# Altium PCB PCB.pcbdoc
Units mil, origin at the board's own origin, x right, y up, seen from the top; angles counter-clockwise.
Board outline 12348.58 x 5931.26 mil, 2 copper layers (Top Layer, Bottom Layer); 75 components, 20 nets, 410 pads, 5 vias.
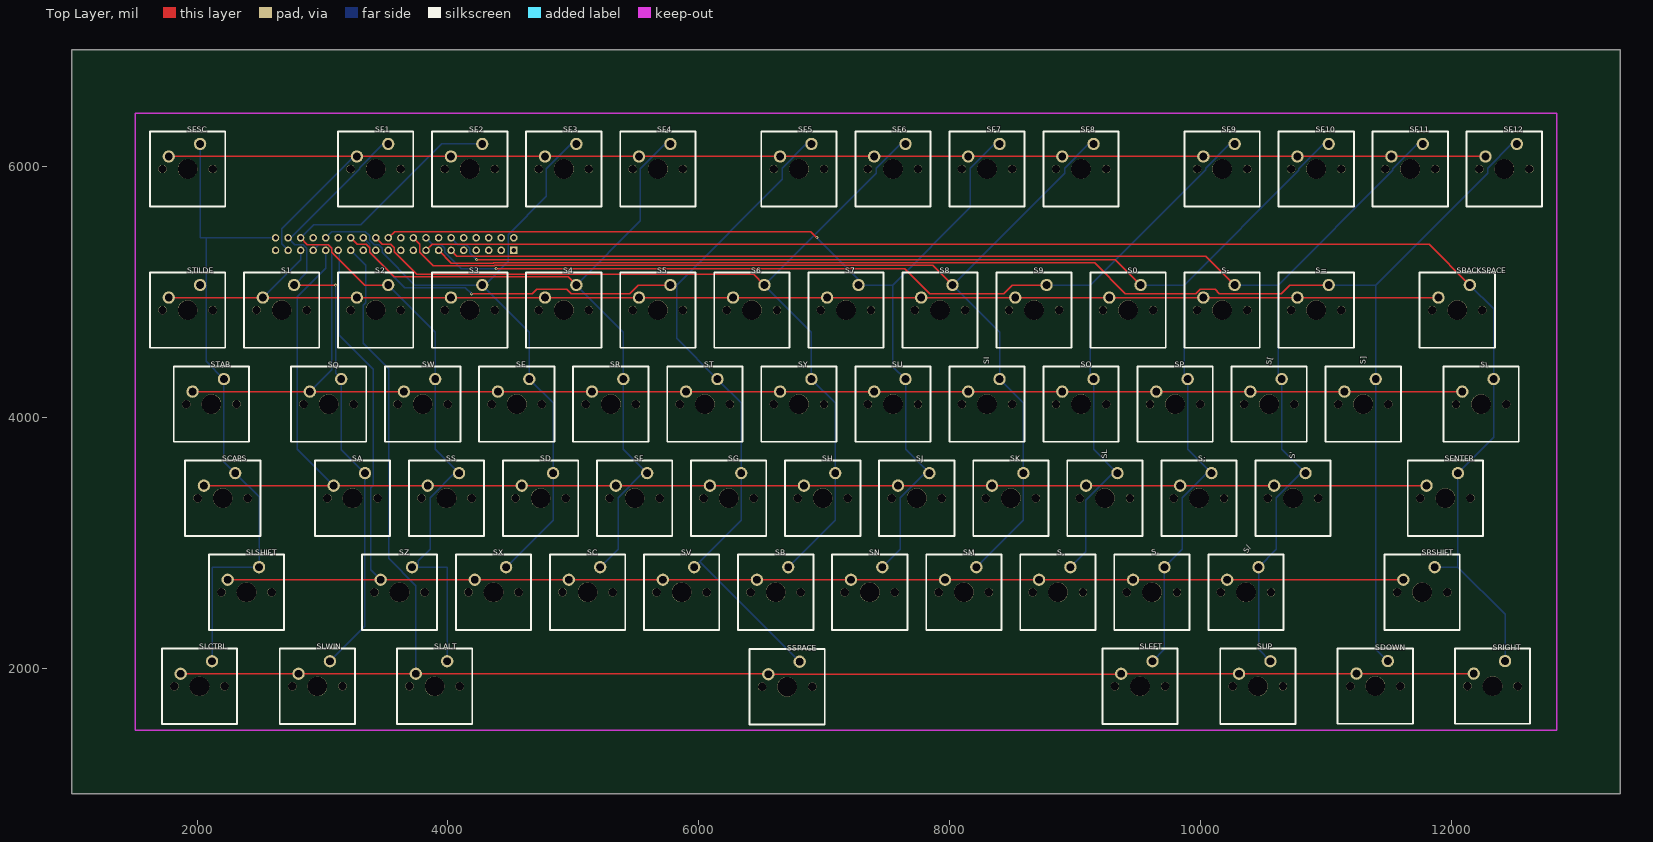
[diagram p0: Top Layer view]
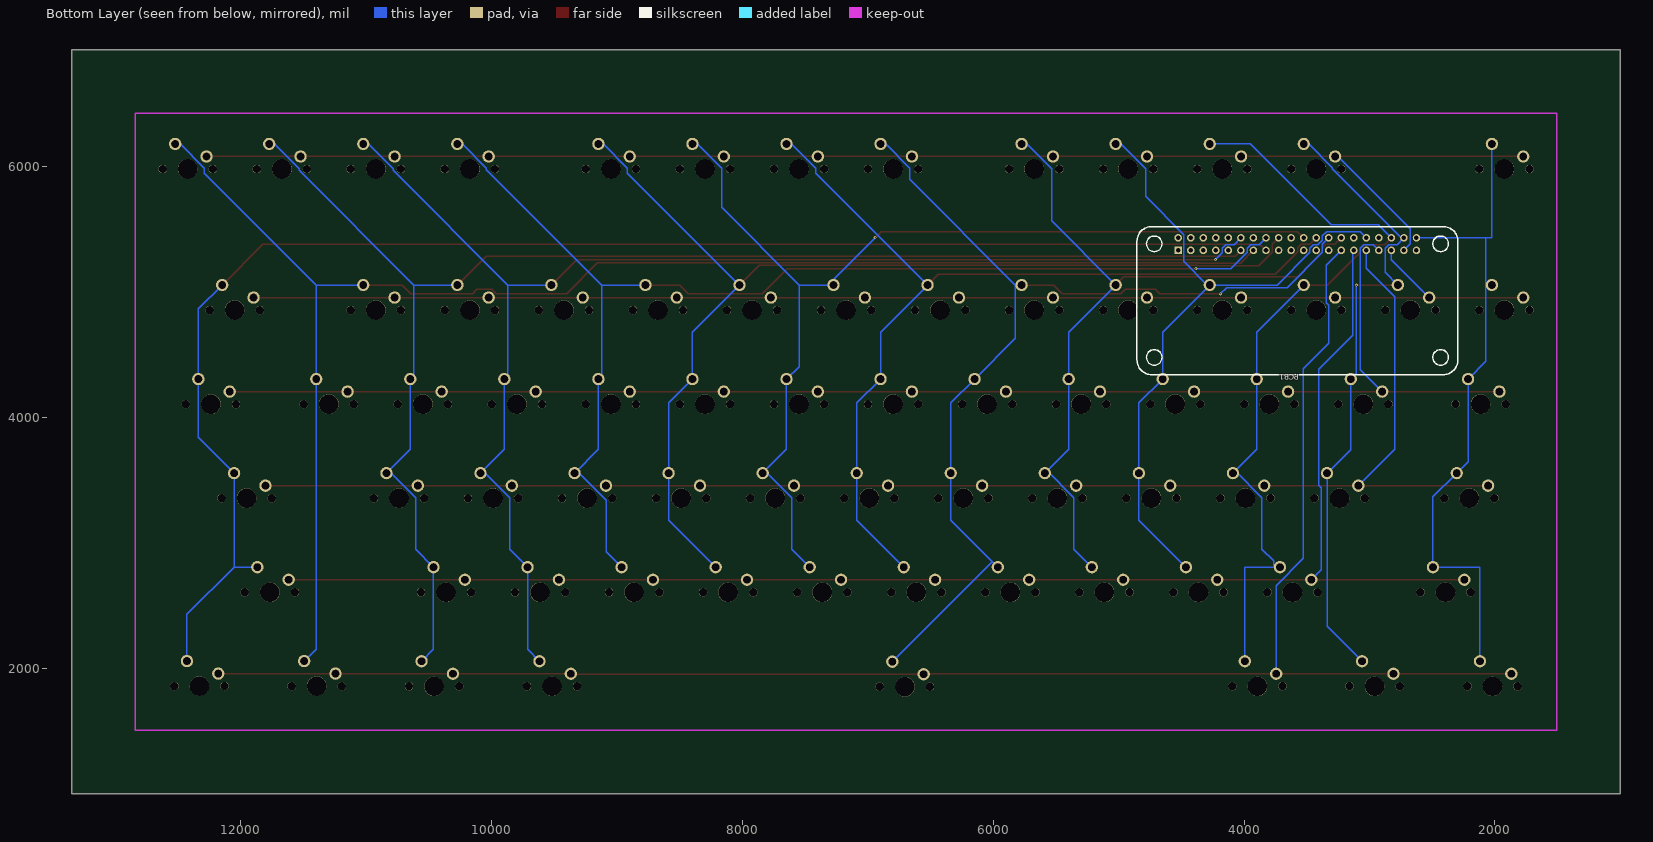
[diagram p1: Bottom Layer view, seen from below]

## Layer stack, top to bottom
Top Layer: signal copper (thickness not stored)
Dielectric: dielectric 12.6, FR-4, Dk 4.8
Bottom Layer: signal copper (thickness not stored)

## Board outline
13348.58,1000 1000,1000 1000,6931.26 13348.58,6931.26

## Components (designator, comment, footprint, x,y, rotation, side; value= is the part's Value field where it differs from the comment)
PCB1 "树莓派BCM编码引脚" "RASPBERRY PI ZERO (FACE UP) OUTLINE" 2295,5521.26 r180 bottom
S0 "MX1A" MX1A 6330,9261.26 r0 top
S1 "MX1A" MX1A -420,9261.26 r0 top
S2 "MX1A" MX1A 330,9261.26 r0 top
S3 "MX1A" MX1A 1080,9261.26 r0 top
S4 "MX1A" MX1A 1830,9261.26 r0 top
S5 "MX1A" MX1A 2580,9261.26 r0 top
S6 "MX1A" MX1A 3330,9261.26 r0 top
S7 "MX1A" MX1A 4080,9261.26 r0 top
S8 "MX1A" MX1A 4830,9261.26 r0 top
S9 "MX1A" MX1A 5580,9261.26 r0 top
S' "MX1A" MX1A 7645,7761.26 r0 top
S, "MX1A" MX1A 5770,7011.26 r0 top
S- "MX1A" MX1A 7080,9261.26 r0 top
S. "MX1A" MX1A 6520,7011.26 r0 top
S/ "MX1A" MX1A 7270,7011.26 r0 top
S; "MX1A" MX1A 6895,7761.26 r0 top
S= "MX1A" MX1A 7830,9261.26 r0 top
S[ "MX1A" MX1A 7455,8511.26 r0 top
S\ "MX1A" MX1A 9145,8511.26 r0 top
S] "MX1A" MX1A 8205,8511.26 r0 top
SA "MX1A" MX1A 145,7761.26 r0 top
SB "MX1A" MX1A 3520,7011.26 r0 top
SBACKSPACE "MX1A" MX1A 8955,9261.26 r0 top
SC "MX1A" MX1A 2020,7011.26 r0 top
SCAPS "MX1A" MX1A -890,7761.26 r0 top
SD "MX1A" MX1A 1645,7761.26 r0 top
SDOWN "MX1A" MX1A_NO3D 11395,1856.26 r0 top
SE "MX1A" MX1A 1455,8511.26 r0 top
SENTER "MX1A" MX1A 8860,7761.26 r0 top
SESC "MX1A" MX1A -1170,10386.26 r0 top
SF "MX1A" MX1A 2395,7761.26 r0 top
SF1 "MX1A" MX1A 330,10386.26 r0 top
SF2 "MX1A" MX1A 1080,10386.26 r0 top
SF3 "MX1A" MX1A 1830,10386.26 r0 top
SF4 "MX1A" MX1A 2580,10386.26 r0 top
SF5 "MX1A" MX1A 3705,10386.26 r0 top
SF6 "MX1A" MX1A 4455,10386.26 r0 top
SF7 "MX1A" MX1A 5205,10386.26 r0 top
SF8 "MX1A" MX1A 5955,10386.26 r0 top
SF9 "MX1A" MX1A 7080,10386.26 r0 top
SF10 "MX1A" MX1A 7830,10386.26 r0 top
SF11 "MX1A" MX1A 8580,10386.26 r0 top
SF12 "MX1A" MX1A 9330,10386.26 r0 top
SG "MX1A" MX1A 3145,7761.26 r0 top
SH "MX1A" MX1A 3895,7761.26 r0 top
SI "MX1A" MX1A 5205,8511.26 r0 top
SJ "MX1A" MX1A 4645,7761.26 r0 top
SK "MX1A" MX1A 5395,7761.26 r0 top
SL "MX1A" MX1A 6145,7761.26 r0 top
SLALT "MX1A" MX1A 800,6261.26 r0 top
SLCTRL "MX1A" MX1A -1075,6261.26 r0 top
SLEFT "MX1A" MX1A 6425,6261.26 r0 top
SLSHIFT "MX1A" MX1A -700,7011.26 r0 top
SLWIN "MX1A" MX1A -135,6261.26 r0 top
SM "MX1A" MX1A 5020,7011.26 r0 top
SN "MX1A" MX1A 4270,7011.26 r0 top
SO "MX1A" MX1A 5955,8511.26 r0 top
SP "MX1A" MX1A 6705,8511.26 r0 top
SQ "MX1A" MX1A -45,8511.26 r0 top
SR "MX1A" MX1A 2205,8511.26 r0 top
SRIGHT "MX1A" MX1A_NO3D 12330,1856.26 r0 top
SRSHIFT "MX1A" MX1A 8675,7011.26 r0 top
SS "MX1A" MX1A 895,7761.26 r0 top
SSPACE "MX1A" MX1A_NO3D 6705,1851.26 r0 top
ST "MX1A" MX1A 2955,8511.26 r0 top
STAB "MX1A" MX1A -980,8511.26 r0 top
STILDE "MX1A" MX1A -1170,9261.26 r0 top
SU "MX1A" MX1A 4455,8511.26 r0 top
SUP "MX1A" MX1A 7365,6261.26 r0 top
SV "MX1A" MX1A 2770,7011.26 r0 top
SW "MX1A" MX1A 705,8511.26 r0 top
SX "MX1A" MX1A 1270,7011.26 r0 top
SY "MX1A" MX1A 3705,8511.26 r0 top
SZ "MX1A" MX1A 520,7011.26 r0 top

## Footprints (in the part's own frame and the unit in brackets; to place one, negate y for a bottom-side part, rotate by r counter-clockwise, add the part's x,y. Pads: shape width x height; smd on the part's side, far side on the other; paste and mask are expansions set on the pad)
MX1A [mil]
  round 98.4 hole 59.1 slot 59.3 at 0 deg: 1(2943.79,-4306.29) 2(3193.79,-4206.29)
  round 66.9 hole 66.9 unplated: ""(2893.79,-4406.29) ""(3293.79,-4406.29)
  round 156.7 hole 156.7 unplated: ""(3093.79,-4406.29)
  silkscreen extent 2794,-4706 3394,-4106
MX1A_NO3D [mil]
  round 98.4 hole 59.1 slot 59.3 at 0 deg: 1(-150,100) 2(100,200)
  round 66.9 hole 66.9 unplated: ""(-200,0) ""(200,0)
  round 156.7 hole 156.7 unplated: ""(0,0)
  silkscreen extent -300,-300 300,300
"RASPBERRY PI ZERO (FACE UP) OUTLINE" [mil]
  rect 60x60 hole 36: 1(-2230,-190)
  round 60 hole 36: 2(-2230,-90) 3(-2130,-190) 4(-2130,-90) 5(-2030,-190) 6(-2030,-90) 7(-1930,-190) 8(-1930,-90) 9(-1830,-190) 10(-1830,-90) 11(-1730,-190) 12(-1730,-90) 13(-1630,-190) 14(-1630,-90) 15(-1530,-190) 16(-1530,-90) 17(-1430,-190) 18(-1430,-90) 19(-1330,-190) 20(-1330,-90) 21(-1230,-190) 22(-1230,-90) 23(-1130,-190) 24(-1130,-90) 25(-1030,-190) 26(-1030,-90) 27(-930,-190) 28(-930,-90) 29(-830,-190) 30(-830,-90) 31(-730,-190) 32(-730,-90) 33(-630,-190) 34(-630,-90) 35(-530,-190) 36(-530,-90) 37(-430,-190) 38(-430,-90) 39(-330,-190) 40(-330,-90)
  silkscreen extent -2559,-1181 0,0

## Via types
v1: diameter 24.02, hole 12.01, Top Layer to Bottom Layer, 5 vias

## Nets (pads, with @x,y where several pads share a name; then routed paths per layer and width w, separated by ;. In a path a pad name is that pad's centre, name@x,y a point inside that pad or via, vN(x,y) a via of type N, cw(c..) or ccw(c..) an arc to the next point about the centre after c; other vN are vias at no path point)
COL1: PCB1.40 SCAPS.2 SESC.2 SLCTRL.2 SLSHIFT.2 STAB.2 STILDE.2 | length 5324.4
  Bottom Layer w10: STILDE.2 STILDE.2@2071.4,5054.96 ; SESC.2 2023.8,5431.26 2071.4,5431.26 ; SLCTRL.2 2120,2056.18 2120,2806.26 SLSHIFT.2 2493.8,3364.96 SCAPS.2 2213.8,3644.96 STAB.2 2071.4,4447.36 STILDE.2@2071.4,5054.96 ; PCB1.40 2071.4,5431.26 ; STILDE.2@2071.4,5054.96 2071.4,5431.26
COL2: PCB1.38 S1.2 SA.2 SF1.2 SLWIN.2 SQ.2 | length 5177.5
  Top Layer w10: S1.2 v1(3103.9,5054.96)
  Bottom Layer w10: S1.2 2875,5156.16 2875,5348.46 2847.1,5376.36 2779.9,5376.36 PCB1.38 2745.8,5431.26 3296.7,5982.26 3296.7,5990.96 3485.7,6179.96 SF1.2 ; SLWIN.2 3337,2333.16 SA.2@3337,3554.96 ; v1(3103.9,5054.96) 3103.9,4349.86 SQ.2 3148.8,3743.16 SA.2@3337,3554.96 ; SA.2 SA.2@3337,3554.96
COL3: PCB1.36 S2.2 SF2.2 SLALT.2 SS.2 SW.2 SZ.2 | length 6293.2
  Top Layer w10: PCB1.36 2879.9,5376.36 3047.1,5376.36 3075,5348.46 3075,5317.26 3337.3,5054.96 S2.2
  Bottom Layer w10: PCB1.36 2929.1,5535.36 3306,5535.36 3950.7,6179.96 SF2.2 ; S2.2 3898.8,4679.96 SW.2 3898.8,3744.96 SS.2@4070.3,3573.46 ; SZ.2 3765.2,2804.96 ; SLALT.2 3995,2806.26 3765.2,2804.96 ; SS.2 SS.2@4070.3,3573.46 ; 3765.2,2804.96 3765.2,2856.46 3857.1,2948.26 3857.1,3360.16 SS.2@4070.3,3573.46
COL4: PCB1.32 S3.2 SD.2 SE.2 SF3.2 SX.2 | length 5591.2
  Bottom Layer w10: PCB1.32 3073.6,5479.86 3342,5479.86 3376,5445.96 3376,5413.56 3413.2,5376.36 3447.1,5376.36 3475,5348.46 3475,5317.26 3737.3,5054.96 S3.2 ; SX.2 4838.8,3179.96 SD.2 4838.8,4114.96 SE.2 4648.8,4679.96 S3.2 ; SF3.2 4984,6179.96 4784.8,5980.76 4784.8,5761.06 4479.9,5456.26 4479.9,5242.76 4292.1,5054.96 S3.2
COL5: PCB1.28 S4.2 SC.2 SF4.2 SF.2 SR.2 | length 6085.4
  Top Layer w10: PCB1.28 3275,5381.26 3346.6,5381.26 3375,5352.76 3375,5315.96 3571.7,5119.26 4959.5,5119.26 S4.2
  Bottom Layer w10: SC.2 5357.1,2948.26 5357.1,3360.16 SF.2@5570.3,3573.46 ; SF.2 SF.2@5570.3,3573.46 ; SF4.2 5734,6179.96 5534.8,5980.76 5534.8,5565.96 S4.2 5398.8,4679.96 SR.2 5398.8,3744.96 SF.2@5570.3,3573.46
COL6: PCB1.26 S5.2 SF5.2 SG.2 SSPACE.2 ST.2 SV.2 | length 8122.4
  Top Layer w10: v1(4188.4,4983.96) 4671,4983.96 4710,5022.96 4947.4,5022.96 4983.7,4986.66 5449.6,4986.66 5517.9,5054.96 S5.2
  Bottom Layer w10: PCB1.26 3375,5381.26 3375,5315.46 3655.6,5034.86 4137.5,5034.86 v1(4188.4,4983.96) ; S5.2 5825.2,5054.96 ; SV.2 6007.5,2848.76 ; SSPACE.2 6007.5,2848.76 ; SF5.2 6859,6179.96 6667.1,5987.96 6667.1,5896.76 5825.2,5054.96 ; 5825.2,5054.96 5825.2,4628.56 ST.2 6338.8,4114.96 SG.2 6338.8,3179.96 6007.5,2848.76
COL7: PCB1.24 S6.2 SB.2 SF6.2 SH.2 SY.2 | length 7526.5
  Top Layer w10: PCB1.24 3475,5381.26 3542.2,5381.26 3570.1,5353.36 3570.1,5322.26 3753,5139.36 6439.4,5139.36 S6.2
  Bottom Layer w10: SB.2 7088.8,3179.96 SH.2 7088.8,4114.96 SY.2 6898.8,4679.96 S6.2 7417.1,5948.26 7417.1,5987.96 7609,6179.96 SF6.2
COL8: PCB1.22 S7.2 SF7.2 SJ.2 SN.2 SU.2 | length 8284.9
  Top Layer w10: PCB1.22 3574.7,5480.96 6894.5,5480.96 v1(6942,5433.56)
  Bottom Layer w10: v1(6942,5433.56) 7273.8,5101.76 S7.2 7548.8,5054.96 ; SN.2 7607.1,2948.26 7607.1,3360.16 SJ.2@7820.3,3573.46 ; SJ.2 SJ.2@7820.3,3573.46 ; SF7.2 8359,6179.96 8167.1,5987.96 8167.1,5673.26 7548.8,5054.96 ; 7548.8,5054.96 7548.8,4404.96 SU.2 7648.8,3744.96 SJ.2@7820.3,3573.46
COL9: PCB1.18 S8.2 SF8.2 SI.2 SK.2 SM.2 | length 8749
  Top Layer w10: PCB1.18 3775,5381.26 3775,5315.46 3881,5209.56 4370,5209.56 4372.8,5212.26 7866.5,5212.26 S8.2
  Bottom Layer w10: SM.2 8588.8,3179.96 SK.2 8588.8,4114.96 SI.2 8398.8,4679.96 S8.2 8917.1,5948.26 8917.1,5987.96 9109,6179.96 SF8.2
COL10: PCB1.16 S9.2 S,.2 SF9.2 SL.2 SO.2 | length 9669.2
  Top Layer w10: v1(4384,5185.16) 7643.6,5185.16 7842.1,4986.66 8433.3,4986.66 8501.6,5054.96 S9.2
  Bottom Layer w10: PCB1.16 3879.9,5376.36 3947.1,5376.36 3975,5348.46 3975,5317.26 4107.1,5185.16 v1(4384,5185.16) ; S9.2 9123.2,5054.96 ; 8963.8,2804.96 9087.3,2928.56 9087.3,3339.06 9303.3,3554.96 SL.2 9148.8,3744.96 SO.2 9123.2,4330.56 9123.2,5054.96 ; SF9.2 10234,6179.96 10042.1,5987.96 10042.1,5973.86 9123.2,5054.96
COL11: PCB1.12 S0.2 S..2 S;.2 SF10.2 SLEFT.2 SP.2 | length 10945
  Top Layer w10: v1(4228.4,5258.16) 9320.6,5258.16 S0.2
  Bottom Layer w10: PCB1.12 4079.9,5376.36 4147.1,5376.36 4175,5348.46 4175,5311.46 v1(4228.4,5258.16) ; S0.2 9870.8,5054.96 ; SLEFT.2 9713.8,2149.96 S..2 9857.1,2948.26 9857.1,3360.16 10070.3,3573.46 ; 10088.8,3554.96 10070.3,3573.46 ; SF10.2 10984,6179.96 10784.8,5980.76 10784.8,5968.96 9870.8,5054.96 ; 9870.8,5054.96 9870.8,4332.96 SP.2 9898.8,3744.96 10070.3,3573.46
COL12: PCB1.11 S'.2 S-.2 S/.2 S[.2 SF11.2 SUP.2 | length 11631.9
  Top Layer w10: PCB1.11 4070.3,5285.96 10042.8,5285.96 S-.2
  Bottom Layer w10: S-.2 10620.8,5054.96 ; SUP.2 10463.8,2149.96 S/.2 10607.1,2948.26 10607.1,3360.16 S'.2@10820.3,3573.46 ; S'.2 S'.2@10820.3,3573.46 ; SF11.2 11734,6179.96 11534.8,5980.76 11534.8,5968.96 10620.8,5054.96 ; 10620.8,5054.96 10620.8,4332.96 S[.2 10648.8,3744.96 S'.2@10820.3,3573.46
COL13: PCB1.13 S=.2 S].2 SDOWN.2 SF12.2 | length 12328.7
  Top Layer w10: PCB1.13 4026.6,5229.66 4361.7,5229.66 4364.5,5232.36 9157.1,5232.36 9402.8,4986.66 9963,4986.66 9998.6,5022.16 10117.3,5022.16 10152.1,4987.36 10646.2,4987.36 10713.8,5054.96 S=.2
  Bottom Layer w10: S=.2 11398.8,5054.96 ; SDOWN.2 11398.8,2152.46 S].2 11398.8,5054.96 ; SF12.2 12484,6179.96 12292.1,5987.96 12292.1,5948.26 11398.8,5054.96
COL14: PCB1.15 S\.2 SBACKSPACE.2 SENTER.2 SRIGHT.2 SRSHIFT.2 | length 12014.3
  Top Layer w10: PCB1.15 3873,5379.26 11824.5,5379.26 SBACKSPACE.2
  Bottom Layer w10: SRSHIFT.2 12053.8,2804.96 ; SBACKSPACE.2 12338.8,4864.96 S\.2 12338.8,3839.96 SENTER.2 12053.8,2804.96 ; SRIGHT.2 12430,2428.76 12053.8,2804.96
ROW1: PCB1.35 S0.1 S1.1 S2.1 S3.1 S4.1 S5.1 S6.1 S7.1 S8.1 S9.1 S-.1 S=.1 SBACKSPACE.1 STILDE.1 | length 10626.1
  Top Layer w10: STILDE.1 S1.1 S2.1 S3.1 S4.1 S5.1 S6.1 S7.1 S8.1 S9.1 S0.1 S-.1 S=.1 SBACKSPACE.1
  Bottom Layer w10: S1.1 2825,5256.16 PCB1.35
ROW2: PCB1.33 S[.1 S\.1 S].1 SE.1 SI.1 SO.1 SP.1 SQ.1 SR.1 ST.1 STAB.1 SU.1 SW.1 SY.1 | length 11521.7
  Top Layer w10: STAB.1 SQ.1 SW.1 SE.1 SR.1 ST.1 SY.1 SU.1 SI.1 SO.1 SP.1 S[.1 S].1 S\.1
  Bottom Layer w10: SQ.1 3075,4381.16 3075,5348.46 3047.1,5376.36 2970.1,5376.36 PCB1.33
ROW3: PCB1.31 S'.1 S;.1 SA.1 SCAPS.1 SD.1 SENTER.1 SF.1 SG.1 SH.1 SJ.1 SK.1 SL.1 SS.1 | length 11839.2
  Top Layer w10: SCAPS.1 SA.1 SS.1 SD.1 SF.1 SG.1 SH.1 SJ.1 SK.1 SL.1 9838.8,3454.96 S'.1 SENTER.1
  Bottom Layer w10: PCB1.31 3025,5188.16 2799.9,4963.06 2799.9,3743.86 SA.1
ROW4: PCB1.29 S,.1 S..1 S/.1 SB.1 SC.1 SLSHIFT.1 SM.1 SN.1 SRSHIFT.1 SV.1 SX.1 SZ.1 | length 12158.2
  Top Layer w10: SLSHIFT.1 SZ.1 SX.1 SC.1 SV.1 SB.1 SN.1 SM.1 8713.8,2704.96 S..1 S/.1 SRSHIFT.1
  Bottom Layer w10: PCB1.29 3133.8,5322.46 3133.8,4654.36 3405.4,4382.76 3405.4,3459.26 3385.4,3439.26 3385.4,2783.36 SZ.1
ROW5: PCB1.27 SDOWN.1 SLALT.1 SLCTRL.1 SLEFT.1 SLWIN.1 SRIGHT.1 SSPACE.1 SUP.1 | length 13922.3
  Top Layer w10: SLCTRL.1 SLWIN.1 SLALT.1 6553.1,1954.96 SSPACE.1@6555,1953.06 ; SSPACE.1 SSPACE.1@6555,1953.06 ; SRIGHT.1 SDOWN.1 11243.7,1954.96 SUP.1 SLEFT.1 9366.9,1953.06 SSPACE.1@6555,1953.06
  Bottom Layer w10: PCB1.27 3342.7,5213.56 3342.7,4913.66 3323.4,4894.36 3323.4,4590.26 3528.1,4385.56 3528.1,2874.26 3743.8,2658.56 SLALT.1
ROWF: PCB1.37 SESC.1 SF1.1 SF2.1 SF3.1 SF4.1 SF5.1 SF6.1 SF7.1 SF8.1 SF9.1 SF10.1 SF11.1 SF12.1 | length 11531.6
  Top Layer w10: SESC.1 SF1.1 SF2.1 SF3.1 SF4.1 SF5.1 SF6.1 SF7.1 SF8.1 SF9.1 SF10.1 SF11.1 SF12.1
  Bottom Layer w10: PCB1.37 2673.8,5382.46 2673.8,5502.46 3251.3,6079.96 SF1.1
pads on no net: PCB1.1 PCB1.2 PCB1.3 PCB1.4 PCB1.5 PCB1.6 PCB1.7 PCB1.8 PCB1.9 PCB1.10 PCB1.14 PCB1.17 PCB1.19 PCB1.20 PCB1.21 PCB1.23 PCB1.25 PCB1.30 PCB1.34 PCB1.39 S0. S1. S2. S3. S4. S5. S6. S7. S8. S9. S'. S,. S-. S.. S/. S;. S=. S[. S\. S]. SA. SB. SBACKSPACE. SC. SCAPS. SD. SDOWN. SE. SENTER. SESC. SF1. SF2. SF3. SF4. SF5. SF6. SF7. SF8. SF9. SF10. SF11. SF12. SF. SG. SH. SI. SJ. SK. SL. SLALT. SLCTRL. SLEFT. SLSHIFT. SLWIN. SM. SN. SO. SP. SQ. SR. SRIGHT. SRSHIFT. SS. SSPACE. ST. STAB. STILDE. SU. SUP. SV. SW. SX. SY. SZ.

## Silkscreen, mask and mechanical layers (free items; w line width, h text height)
Document:
  lines w0.1: 7173.29,3964.63 7175.29,3966.63